# Altium PCB relaxed_transition.PcbDoc
Units mil, origin at the board's own origin, x right, y up, seen from the top; angles counter-clockwise.
Board outline 440 x 557.79 mil, 4 copper layers (Top Layer, GND, POWER, Bottom Layer), stack 61.066 mil thick; 2 components, 3 nets, 4 pads, 38 vias.
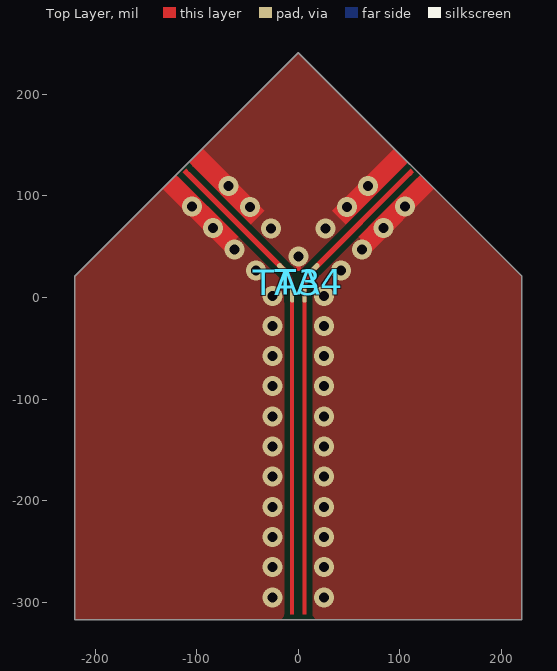
[diagram p0: Top Layer view]
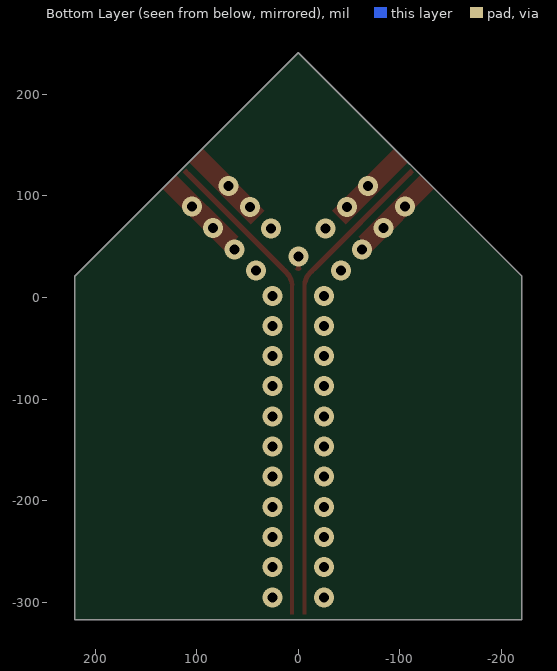
[diagram p1: Bottom Layer view, seen from below]
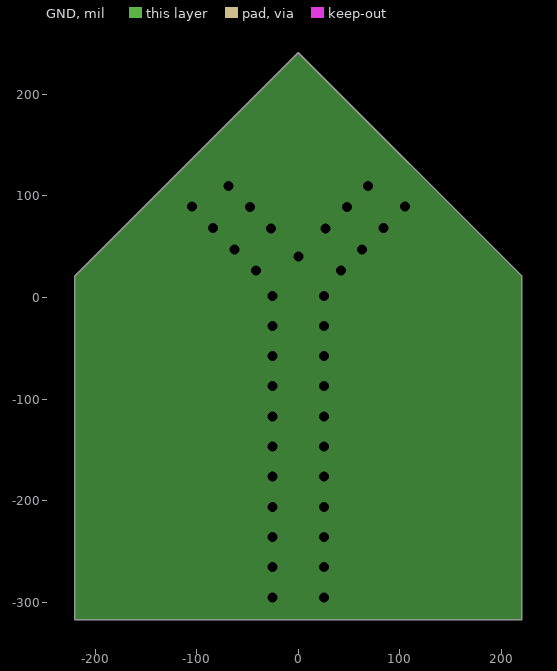
[diagram p2: GND, clearances drawn from the general rule]
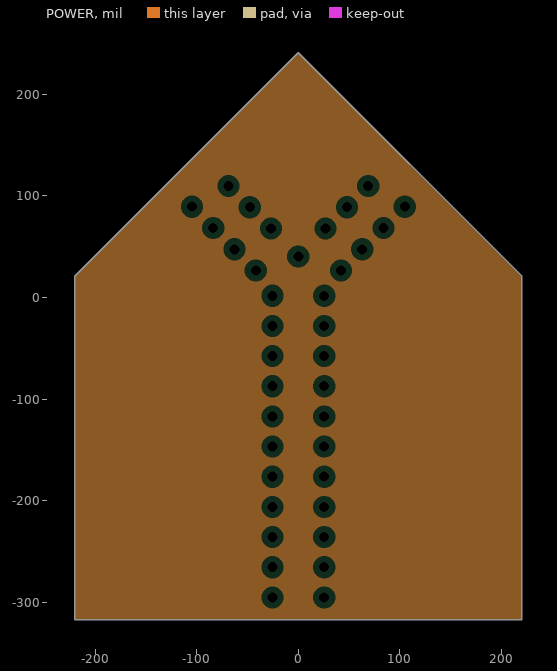
[diagram p3: POWER, clearances drawn from the general rule]

## Layer stack, top to bottom
Top Solder: solder mask 1.9689, Solder Resist, Dk 4.6
Top Layer: signal copper 1.772
Core_Top: core 3.937, R-5775G_1035, Dk 3.46
GND: plane copper 0.689, net GND
PrePreg_Top: prepreg 9.3709, R-5670G, Dk 3.4
Core: core 29.528, R-5775G_2116, Dk 3.71
PrePreg_Bot: prepreg 9.3709, R-5670G, Dk 3.4
POWER: plane copper 0.689
Core_Bottom: core 3.937, R-5775G_1035, Dk 3.46
Bottom Layer: signal copper 1.772
Bottom Solder: solder mask 1.9689, Solder Resist, Dk 4.6

## Board outline
-220,-316.96 -220,20.83 0,240.83 220,20.83 220,-316.96

## Design rules (kind name [scope] priority, off if disabled: settings)
BoardOutlineClearance BoardOutlineClearance_Silk_PWR_Connector [InComponentClass('PWR_Connector')] p1: gap=0 ignorepadtopadclearanceinfootprint=FALSE
BoardOutlineClearance [All] p2: gap=0 ignorepadtopadclearanceinfootprint=FALSE
Clearance Clearance_SMA_pad [HasFootprint('SAMTEC_SMA-J-P-H-ST-MT1') and InNetClass('50ohm')] p1: gap=4 ignorepadtopadclearanceinfootprint=FALSE except(27.6: SMDPad-Fill SMDPad-Poly SMDPad-Region)
Clearance Clearance_Coplanar [InAnyDifferentialPair or InNetClass('50ohm')] p2: gap=4 ignorepadtopadclearanceinfootprint=FALSE except(6: Arc-Fill Arc-Poly Arc-Region Track-Fill Track-Poly Track-Region Fill-Fill Fill-Poly Fill-Region Poly-Poly Poly-Region Region-Region)
Clearance [All] p3: gap=4 ignorepadtopadclearanceinfootprint=FALSE
ComponentClearance [All] p1: gap=-20 collisioncheckmode=3 verticalgap=0 showdistances=FALSE
DiffPairsRouting [InDifferentialPairClass('All Differential Pairs')] p1: maxlimit=8.23 minlimit=8.23 mostfreqgap=8.23 toplayer_minwidth=4 toplayer_maxwidth=4 toplayer_prefwidth=4 bottomlayer_minwidth=4 bottomlayer_maxwidth=4 bottomlayer_prefwidth=4 impedanceprofiledriven=TRUE impedanceprofileid={AF162B1C-EAC7-4E04-BA8C-BC68D21A2CEA} impedanceprofilevalue=100.000000 maxuncoupledlength=200
HoleSize [All] p1: absolutevalues=TRUE maxlimit=255.91 minlimit=9.84 maxpercent=80.000 minpercent=20.000
HoleToHoleClearance [Isvia] p1: gap=11 allowstackedmicrovias=TRUE
HoleToHoleClearance HoleToHoleClearance_Standard [All] p2: gap=16 allowstackedmicrovias=TRUE
MatchedLengths MatchedLengths_Output_Lanes [InNetClass('Output_Lanes')] p1: tolerance=10 checknetsindiffpair=FALSE checkdiffpairvsdiffpair=TRUE checkxsignals=TRUE checkothers=TRUE
MatchedLengths MatchedLengths_Inside [InDifferentialPairClass('All Differential Pairs')] p2: tolerance=1 checknetsindiffpair=TRUE checkdiffpairvsdiffpair=FALSE checkxsignals=FALSE checkothers=FALSE
MinimumAnnularRing [not IsVia] p1: minimumring=6
MinimumSolderMaskSliver [All] p1: minsoldermaskwidth=2
PlaneClearance [All] p1: clearance=6
PlaneConnect PlaneConnect_Frame_Hole [InPadClass('Frame_Holes')] p1: planeconnectstyle=Direct reliefexpansion=20 reliefentries=4 reliefconductorwidth=10 reliefairgap=10
PlaneConnect PlaneConnect_PWR [InComponentClass('PWR_Jumper')] p2: planeconnectstyle=Relief reliefexpansion=20 reliefentries=4 reliefconductorwidth=25 reliefairgap=7
PlaneConnect [All] p3: pad.planeconnectstyle=Relief pad.reliefexpansion=20 pad.reliefentries=4 pad.reliefconductorwidth=12 pad.reliefairgap=7 via.planeconnectstyle=Direct via.reliefexpansion=20 via.reliefentries=4 via.reliefconductorwidth=10 via.reliefairgap=10
PolygonConnect PolygonConnect_Frame_Hole [InPadClass('Frame_Holes')] p1: connectstyle=Direct reliefconductorwidth=10 reliefentries=4 polygonreliefangle="90 Angle" airgapwidth=10
PolygonConnect PolygonConnect_Direct [(HasFootprint('CP_32_11_ADI') OR HasFootprint('LLL03TR61E333KE01') OR HasFootprint('SON50P300X300X80-11N-R175X248') OR HasFootprint('CAPC0510X04N'))] p2: connectstyle=Direct reliefconductorwidth=10 reliefentries=4 polygonreliefangle="90 Angle" airgapwidth=10 // LDO, CDR, some small capacitor
PolygonConnect PolygonConnect_Large [AsMM(PadXSize_AllLayers + PadYSize_AllLayers) > 2.5] p3: thpad.connectstyle=Relief thpad.reliefconductorwidth=20 thpad.reliefentries=4 thpad.polygonreliefangle="90 Angle" thpad.airgapwidth=4 smdpad.connectstyle=Relief smdpad.reliefconductorwidth=25 smdpad.reliefentries=4 smdpad.polygonreliefangle="90 Angle" smdpad.airgapwidth=4 via.connectstyle=Direct via.reliefconductorwidth=10 via.reliefentries=4 via.polygonreliefangle="90 Angle" via.airgapwidth=10
PolygonConnect "PolygonConnect_ Mid" [AsMM(PadXSize_AllLayers + PadYSize_AllLayers) > 1.5] p4: thpad.connectstyle=Relief thpad.reliefconductorwidth=12 thpad.reliefentries=4 thpad.polygonreliefangle="90 Angle" thpad.airgapwidth=4 smdpad.connectstyle=Relief smdpad.reliefconductorwidth=12 smdpad.reliefentries=4 smdpad.polygonreliefangle="90 Angle" smdpad.airgapwidth=4 via.connectstyle=Direct via.reliefconductorwidth=12 via.reliefentries=4 via.polygonreliefangle="90 Angle" via.airgapwidth=5
PolygonConnect [All] p5: thpad.connectstyle=Relief thpad.reliefconductorwidth=10 thpad.reliefentries=4 thpad.polygonreliefangle="90 Angle" thpad.airgapwidth=4 smdpad.connectstyle=Relief smdpad.reliefconductorwidth=8 smdpad.reliefentries=4 smdpad.polygonreliefangle="90 Angle" smdpad.airgapwidth=4 via.connectstyle=Direct via.reliefconductorwidth=10 via.reliefentries=4 via.polygonreliefangle="90 Angle" via.airgapwidth=10
RoutingVias [All] p1: holewidth=9.84 width=19.68 viastyle="Through Hole" minholewidth=9.84 minwidth=19.68 maxholewidth=11.81 maxwidth=23.62
SilkToSilkClearance [All] p1: silktosilkclearance=0
SilkToSolderMaskClearance [IsPad] p1: minsilkscreentomaskgap=3.5 clearancetoexposedcopper=TRUE
SolderMaskExpansion SolderMaskExpansion_Via [IsVia] p1: expansion=4 istentingtop=TRUE
SolderMaskExpansion [All] p2: expansion=0 istentingtop=FALSE
Width Width_50ohm [InNetClass('50ohm')] p1: maxlimit=5.18 minlimit=4 preferedwidth=5.18 impedanceprofiledriven=TRUE impedanceprofileid={8C2D255A-A2D8-4A55-9135-FE80466845AA} impedanceprofilevalue=50.000000 minimp=50.000000 maximp=50.000000 favimp=50.000000
Width [All] p2: maxlimit=100 minlimit=4 preferedwidth=6 minimp=50.000000 maximp=50.000000 favimp=50.000000
21 further rules are at their usual default settings.

## Classes and differential pairs
net class 50ohm: T_N T_P

## Components (designator, comment, footprint, x,y, rotation, side; value= is the part's Value field where it differs from the comment)
TA3 "Differential to Single Transition" lane_width_transition#1 0,12.84 r180 top net-tie
TA4 "Differential to Single Transition" lane_width_transition#2 0,12.84 r0 top net-tie

## Footprints (in the part's own frame and the unit in brackets; to place one, negate y for a bottom-side part, rotate by r counter-clockwise, add the part's x,y. Pads: shape width x height; smd on the part's side, far side on the other; paste and mask are expansions set on the pad)
lane_width_transition#1 [mil]
  oval 4x15 smd paste-99999 mask+0: D(6.11,10.45)
  oval 14x5.18 smd rot 135 paste-99999 mask+0: S(15.27,-15.27)
  Top Layer region: 4.61,0.72 5.71,-5.81 8.97,-11.74 13.29,-10.34 10.63,-6.95 9.08,-3.38 7.86,0.45
  Top Layer lines w1: 13.29,-10.34 cw(c27.61,3.63) 7.61,3.63 ; 10.74,-13.69 cw(c24.61,0.72) 4.61,0.72
  Top Layer lines w4: 6.11,5.89 6.11,0.45
  Top Layer lines w5.18: 13.37,-13.37 11.74,-11.74
lane_width_transition#2 [mil]
  oval 4x15 smd paste-99999 mask+0: D(6.11,-10.45)
  oval 14x5.18 smd rot 45 paste-99999 mask+0: S(15.27,15.27)
  Top Layer region: 4.61,-0.72 5.71,5.81 8.97,11.74 13.29,10.34 10.63,6.95 9.08,3.38 7.86,-0.45
  Top Layer lines w1: 4.61,-0.72 cw(c24.61,-0.72) 10.74,13.69 ; 7.61,-3.63 cw(c27.61,-3.63) 13.29,10.34
  Top Layer lines w4: 6.11,-5.89 6.11,-0.45
  Top Layer lines w5.18: 11.74,11.74 13.37,13.37

## Part data
TA3 TA4: library part lane_width_transition

## Via types
v1: diameter 19.68, hole 9.84, Top Layer to Bottom Layer, tented both sides, 38 vias

## Nets (pads, with @x,y where several pads share a name; then routed paths per layer and width w, separated by ;. In a path a pad name is that pad's centre, name@x,y a point inside that pad or via, vN(x,y) a via of type N, cw(c..) or ccw(c..) an arc to the next point about the centre after c; other vN are vias at no path point)
GND:  | length 5.1
  Top Layer w5: 0,28.52 v1@0,33.65
  other v1: -25.45,-295.14 25.45,-295.14 -25.45,-265.45 25.45,-265.45 -25.45,-235.77 25.45,-235.77 -25.45,-206.08 25.45,-206.08 -25.45,-176.4 25.45,-176.4 -25.45,-146.71 25.45,-146.71 -25.45,-117.03 25.45,-117.03 -25.45,-87.34 25.45,-87.34 -25.45,-57.66 25.45,-57.66 -25.45,-27.97 25.45,-27.97 -25.45,1.71 25.45,1.71 -41.85,26.43 41.84,26.43 0,40.43 0,40.43 -62.84,47.42 62.84,47.42 -26.82,67.91 26.82,67.91 -83.83,68.41 83.83,68.41 -47.81,88.9 47.81,88.9 -104.82,89.4 104.82,89.4 -68.8,109.89 68.8,109.89
T_N: TA4.D TA4.S | length 447.1
  Top Layer w4: 6.11,-309.96 TA4.D@6.11,5.13
  Top Layer w5.18: TA4.S 108.63,121.46
T_P: TA3.D TA3.S | length 447.1
  Top Layer w4: -6.11,-309.96 TA3.D@-6.11,5.13
  Top Layer w5.18: -108.63,121.46 TA3.S

## Polygon pours and split planes (outlines as drawn)
GND on Top Layer "GND_L01_P000" (solid, pour order 0): 220,-316.96 -220,-316.96 -220,20.83 0,240.83 220,20.83
GND on GND (split plane): 219.95,20.81 219.95,-316.91 -219.95,-316.91 -219.95,20.81 0,240.75
no net on POWER (split plane): 219.95,20.81 219.95,-316.91 -219.95,-316.91 -219.95,20.81 0,240.75

## Other copper
Top Layer:
  region net T_N: 110.46,119.63 114.12,123.3 110.46,126.96 106.8,123.3
  region net T_P: -106.8,123.3 -110.46,126.96 -114.12,123.3 -110.46,119.63
  region net GND: -33.08,85.46 -94.22,146.61 -107.92,132.91 -46.77,71.76
  region net GND: -58.92,59.61 -120.07,120.76 -133.77,107.06 -72.62,45.91
  region net GND: 72.62,45.91 133.77,107.06 120.07,120.76 58.92,59.61
  region net GND: 46.77,71.76 107.92,132.91 94.22,146.61 33.08,85.46
  region net T_P: -4.11,-307.96 -8.11,-307.96 -8.11,-311.96 -4.11,-311.96
  rectangle net T_N: 4.11,-311.96 8.11,-307.96
  pour cut-out: 14.12,-5.08 10.12,-5.08 10.12,9.52 14.12,9.52
  pour cut-out: -14.12,-5.08 -10.12,-5.08 -10.12,9.52 -14.12,9.52
  pour cut-out: -17.85,18.54 -15.03,21.37 -28.63,34.97 -31.46,32.15
  pour cut-out: 17.85,18.54 15.03,21.37 28.63,34.97 31.46,32.15
  pour cut-out: 12.69,37.67 15.52,34.84 1.91,21.24 -0.92,24.07
  pour cut-out: -12.69,37.67 -15.52,34.84 -1.91,21.24 0.92,24.07
  region net GND: -3.53,28.51 3.53,28.51 1.82,26.8 -1.82,26.8

## Silkscreen, mask and mechanical layers (free items; w line width, h text height)
Mechanical 1:
  lines w4: -220,-316.96 220,-316.96 ; -220,-316.96 220,-316.96 ; -220,-316.96 -220,20.83 0,240.83 220,20.83 220,-316.96